# Altium PCB MainPCB.PcbDoc (part 3 of 3)
Units mil, origin at the board's own origin, x right, y up, seen from the top; angles counter-clockwise.
Board outline 2751.85 x 1031.01 mil, 4 copper layers (L1, L2, L3, L4), stack 61.583 mil thick; 64 components, 73 nets, 299 pads, 162 vias.
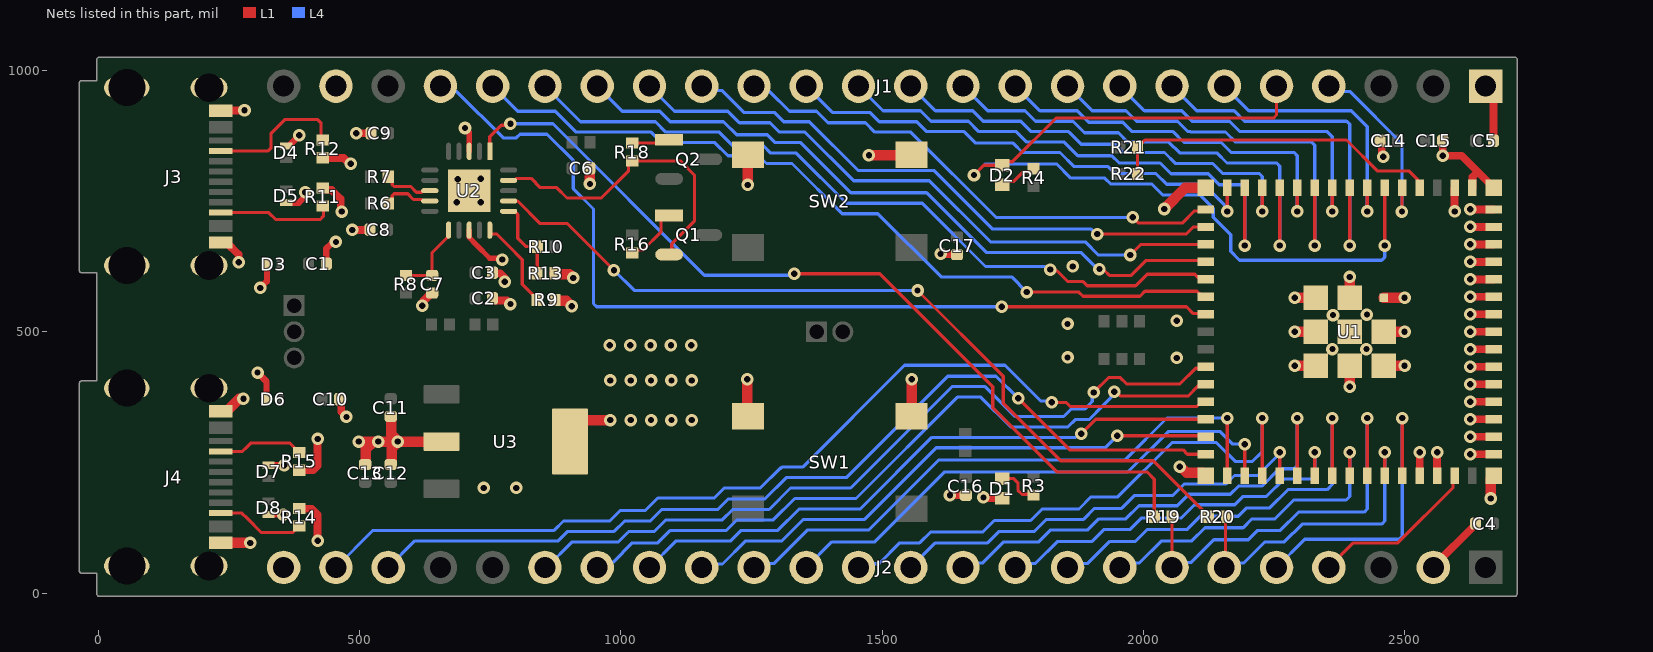
[diagram p4: the nets of this part, all layers, seen from the top]

## Via types
v1: diameter 24, hole 12, L1 to L4, tented both sides, 162 vias

## Nets (pads, with @x,y where several pads share a name; then routed paths per layer and width w, separated by ;. In a path a pad name is that pad's centre, name@x,y a point inside that pad or via, vN(x,y) a via of type N, cw(c..) or ccw(c..) an arc to the next point about the centre after c; other vN are vias at no path point) (continued)
FTDI_RESET: C7.2 R8.2 U2.11 | length 149.8
  L1 w6: R8.2@589,608.01 R8.2@589,608.01 638.96,607.97 C7.2@639,607.93 639,651.65 670.63,683.28 U2.11@670.63,694.59
FTDI_USB_N: R6.2 U2.9 | length 97.2
  L1 w6.03: R6.2@555.01,745.56 562.62,753.17 562.62,760.51 566.16,764.04 592.3,764.04 603.2,753.14 619.05,753.14 621.88,750.32 U2.9@634.59,750.32
FTDI_USB_P: R7.2 U2.8 | length 97.2
  L1 w6.03: R7.2@555.01,796.56 562.62,788.94 562.62,781.61 566.16,778.07 598.11,778.07 609.01,767.17 619.05,767.17 621.88,770 U2.8@634.59,770
GND: C1.1 C2.1 C3.1 C4.1 C5.1 C6.1 C7.1 C8.1 C9.1 C10.1 C11.1 C12.1 C13.1 C14.1 C15.1 C16.1 C17.1 D1.1 D3.1 D4.1 D5.1 D6.1 D7.1 D8.1 J1.1 J1.23 J2.2 J2.24 J3.A1B12 J3.B1A12 J3.S1 J3.S2 J3.S3 J3.S4 J4.A1B12 J4.B1A12 J4.S1 J4.S2 J4.S3 J4.S4 R9.2 R11.1 R12.1 R13.2 R14.1 R15.1 SW1.3 SW1.4 SW2.3 SW2.4 U1.1 U1.2 U1.42 U1.43 U1.46 U1.47 U1.48 U1.49 U1.50 U1.51 U1.52 U1.53 U1.54 U1.55 U1.56 U1.57 U1.58 U1.59 U1.60 U1.61 U1.62 U1.63 U1.64 U1.65 U1.66 U1.67 U1.68 U1.69 U1.70 U1.71 U1.72 U1.73 U2.3 U2.13 U2.21 U3.2 U3.4 | length 3857
  L1 w10.01: v1(702,890) 710,882 U2.3@710,845.41 ; U2.13@710,694.59 710,680.2 724.2,666 749.32,640.88 770.52,640.88 v1(773.2,638.2)
  L1 w12: v1(305,422) 322.12,404.88 D6.1@322.12,371 ; v1@309,584 v1(310,584) 322.95,596.95 D3.1@322.95,629 ; D8.1@326,150.2 v1(354.48,150.2) ; D7.1@326,244.8 v1(355.88,244.8) ; D5.1@360,747.2 384.2,747.2 396,759 v1(396,767) ; D4.1@360,855.59 364.92,855.59 385,875.67 v1(385,876) ; C1.1@436.68,630.23 436.68,659.43 446.95,669.7 452.7,669.7 v1(455,672)
  L1 w15: J3.B1A12@234.84,671.02 245.67,671.02 269,647.68 v1(269,633) ; J3.A1B12@234.84,922.98 235.35,923.49 279.49,923.49 v1(280,924) ; R14.1@385,162.01 385.63,161.37 408.63,161.37 420,150 v1(420,100) ; R15.1@385,234.99 411.21,234.99 420,243.78 v1(420,295) ; R11.1@430,775.01 433.13,771.88 446.3,771.88 464.28,753.9 464.28,731.72 v1(466,730) ; R12.1@430,832.99 434.01,832.99 434.31,832.69 469.88,832.69 481.02,821.54 v1(483.46,821.54) ; C10.1@461.93,371 465.06,367.87 465.06,346.94 v1(475,337) ; v1(486,695) 519.51,695 C8.1@520.07,695.56 ; v1(494,880) C9.1@522.07,880 ; v1(620,550) 621.72,551.72 621.72,557.97 637.82,574.07 C7.1@639,574.07 ; C2.1@754.93,564 754.93,562.82 758.06,559.69 782.31,559.69 v1(789,553) ; C3.1@754.93,613 755.93,612 769.21,612 778,603.21 v1(778,596) ; v1(1612,649) 1612.62,648.38 1642.89,648.38 C17.1@1643.5,647.76 ; v1(1630,187) 1630.06,187.06 1660.44,187.06 C16.1@1660.5,187.12 ; v1(1694,183) 1694.85,182.15 1729.15,182.15 D1.1@1730,181.3 ; C14.1@2453.03,865.55 2456.16,862.42 2456.16,837.84 v1(2459,835) ; U1.42@2528.89,224.41 v1(2528.89,269.58) ; J2.2@2555,49 2555,50.75 2636.07,131.82 C4.1@2636.07,133 ; U1.43@2562.35,224.41 v1(2562.35,269.58) ; C15.1@2573.1,865.55 2573.1,837.1 v1(2573,837) 2609.21,837 2639.92,806.3 ; v1(2595.82,730.42) U1.2@2595.82,775.59 ; v1(2625.45,265.75) U1.46@2670.62,265.75 ; v1(2625.45,299.21) U1.47@2670.62,299.21 ; v1(2625.45,332.68) U1.48@2670.62,332.68 ; v1(2625.45,366.14) U1.49@2670.62,366.14 ; v1(2625.45,399.61) U1.50@2670.62,399.61 ; v1(2625.45,433.07) U1.51@2670.62,433.07 ; v1(2625.45,466.54) U1.52@2670.62,466.54 ; v1(2625.45,500) U1.53@2670.62,500 ; v1(2625.45,533.46) U1.54@2670.62,533.46 ; v1(2625.45,566.93) U1.55@2670.62,566.93 ; v1(2625.45,600.39) U1.56@2670.62,600.39 ; v1(2625.45,633.86) U1.57@2670.62,633.86 ; v1(2625.45,667.32) U1.58@2670.62,667.32 ; v1(2625.45,700.79) U1.59@2670.62,700.79 ; v1(2625.45,734.25) U1.60@2670.62,734.25 ; U1.1@2629.28,775.59 2629.66,775.96 2629.66,796.04 2639.92,806.3 ; J1.1@2655,970 2669.95,955.05 C5.1@2669.95,865.55 ; U1.62@2670.62,775.59 2639.92,806.3
  L1 w20: J4.B1A12@234.84,96.02 v1(291,96) ; J4.A1B12@234.84,347.98 245.67,347.98 269.68,372 v1(278,372) ; v1(498.5,290) v1(536,290) v1(573.5,290) ; C13.1@512.18,245.93 512.18,275.18 v1@527,290 ; C12.1@560,245.93 561.18,245.93 561.81,246.56 561.81,277.23 573.5,288.92 v1(573.5,290) ; C11.1@560,338.07 560.44,338.07 561.07,337.44 561.07,303.51 573.5,291.08 v1(573.5,290) ; U3.2@656.97,290 v1(573.5,290) ; R13.2@873.91,611.89 873.91,610.7 874.54,610.07 901.93,610.07 v1(909,603) ; R9.2@874.23,560.89 874.23,559.7 874.86,559.07 895.93,559.07 v1(906,549) ; U3.4@903.03,290 903.03,306.55 927.48,331 v1(980,331) ; C6.1@940.93,813 940.96,812.96 v1(941,783) v1(941,783) ; v1(1242,409) 1242,340.09 SW1.4@1243.5,338.58 ; v1(1243,781) 1243,838.08 SW2.4@1243.5,838.58 ; v1(1475,838) 1555.91,838 SW2.3@1556.5,838.58 ; SW1.3@1556.5,338.58 1557,339.09 v1(1557,409) ; v1(2040,735) 2080.59,775.59 U1.63@2119.44,775.59 ; v1(2070,242) 2071.08,242 2082.92,230.16 2113.69,230.16 U1.64@2119.44,224.41 ; v1(2290,435.08) U1.73@2330.03,435.08 ; v1(2290,500.04) U1.72@2330.03,500.04 ; v1(2290,565) 2330.03,565 U1.71@2330.07,564.96 ; v1(2394.99,394.97) U1.70@2395.03,435.04 ; U1.69@2395.07,565 v1(2395.07,605.03) ; U1.68@2459.99,435.04 v1(2500.06,435) ; U1.67@2459.99,500 v1(2500.06,499.96) ; U1.66@2460.03,564.92 v1(2500.06,564.92) ; v1(2665,181) 2665,218.79 U1.65@2670.62,224.41
  other v1: 737.95,201.24 800,201.24 1019,331 1058,331 1097,331 1136,331 980,407 1019,407 1058,407 1097,407 1136,407 2063.98,450 1855,451 2362,467 2427,467 979,474 1018,474 1057,474 1096,474 1135,474 1855,515 2063.98,521 2363,532 2428,533 1865,625 686,748 732,748 688,792 732,793
GPIO0: R21.2 R22.2 U1.4 | length 641.9
  L1 w6: R22.2@1989.01,802 1989.01,854.18 1994.64,859.81 1995.82,859.81 2003.01,867 2388.82,867 2447.82,808 2507.85,808 2526.01,789.84 2526.01,778.46 U1.4@2528.89,775.59
GPIO1: J1.4 U1.5 | length 361.3
  L1 w6: v1(2495,730) 2495,775.17 U1.5@2495.42,775.59
  L4 w6: J1.4@2355,970 2365,960 2395,960 2495,860 v1(2495,730)
GPIO2: D2.1 J1.5 U1.6 | length 1716.4
  L1 w6: v1(1676,800) 1694.7,818.7 D2.1@1730,818.7 1736.81,825.51 1749.51,825.51 1833,909 2249.14,909 2255,914.86 J1.5@2255,970 ; v1(2461.96,665.03) U1.6@2461.96,775.59
  L4 w6: v1(1676,800) 1697,821 1834.29,821 1861.29,794 1926.29,794 1937.29,783 2015.73,783 2036.73,762 2108.01,762 2133.78,736.23 2133.78,719.24 2167.24,685.78 2167.24,653.85 2184.09,637 2456.1,637 2461.96,642.86 v1(2461.96,665.03)
GPIO3: J1.6 U1.7 | length 512.9
  L1 w6: v1(2428.49,730.42) U1.7@2428.49,775.59
  L4 w6: J1.6@2155,970 2202,923 2398.04,923 2428.49,892.54 v1(2428.49,730.42)
GPIO4: J1.7 U1.8 | length 712.9
  L1 w6: v1(2395.03,665.03) U1.8@2395.03,775.59
  L4 w6: J1.7@2055,970 2102,923 2173.72,923 2193.72,903 2389.17,903 2395.03,897.14 v1(2395.03,665.03)
GPIO5: J1.8 U1.9 | length 634.7
  L1 w6: v1(2361.57,730.42) U1.9@2361.57,775.59
  L4 w6: J1.8@1955,970 2002,923 2073.72,923 2093.72,903 2165,903 2185,883 2352,883 2361.57,873.43 v1(2361.57,730.42)
GPIO6: J1.9 U1.10 | length 822.5
  L1 w6: v1(2328.1,665.03) U1.10@2328.1,775.59
  L4 w6: J1.9@1855,970 1902,923 1967,923 1987,903 2065.43,903 2085.43,883 2090,883 2090.64,882.36 2157.36,882.36 2176.72,863 2322.24,863 2328.1,857.14 v1(2328.1,665.03)
GPIO7: J1.10 U1.11 | length 746.6
  L1 w6: v1(2294.64,730.42) U1.11@2294.64,775.59
  L4 w6: J1.10@1755,970 1802,923 1873.72,923 1895.72,901 1960.72,901 1978.72,883 2057.15,883 2077.79,862.36 2149.07,862.36 2168.43,843 2288.78,843 2294.64,837.14 v1(2294.64,730.42)
GPIO8: J1.11 U1.12 | length 932.2
  L1 w6: v1(2261.17,665.03) U1.12@2261.17,775.59
  L4 w6: J1.11@1655,970 1702,923 1773.72,923 1793.72,903 1865.43,903 1887.43,881 1952.43,881 1970.43,863 2048.86,863 2069.51,842.36 2140.79,842.36 2160.15,823 2255.31,823 2261.17,817.14 v1(2261.17,665.03)
GPIO9: J1.12 U1.13 | length 856.2
  L1 w6: v1(2227.71,730.42) U1.13@2227.71,775.59
  L4 w6: J1.12@1555,970 1602,923 1673.72,923 1693.72,903 1765.43,903 1785.43,883 1857.15,883 1881.15,859 1946.15,859 1962.15,843 2040.58,843 2061.22,822.36 2132.51,822.36 2151.86,803 2221.85,803 2227.71,797.14 v1(2227.71,730.42)
GPIO10: J1.13 U1.14 | length 1040.9
  L1 w6: v1(2194.24,665.03) U1.14@2194.24,775.59
  L4 w6: J1.13@1455,970 1502,923 1573.72,923 1593.72,903 1665.43,903 1685.43,883 1757.15,883 1777.15,863 1848.86,863 1874.86,837 1939.86,837 1953.86,823 2032.29,823 2052.94,802.36 2124.22,802.36 2145.09,781.49 2188.38,781.49 2194.24,775.63 v1(2194.24,665.03)
GPIO11: J1.14 U1.15 | length 954.3
  L1 w6: v1(2160.78,730.42) U1.15@2160.78,775.59
  L4 w6: J1.14@1355,970 1405,920 1476.72,920 1493.72,903 1494,903 1495,902 1566.43,902 1585.43,883 1657.15,883 1679.15,861 1750.86,861 1768.86,843 1840.58,843 1867.58,816 1932.58,816 1945.58,803 2024.01,803 2044.65,782.36 2115.94,782.36 2155.23,743.06 2155.23,739.76 2160.78,734.21 v1(2160.78,730.42)
GPIO12: J1.15 U1.16 | length 983.8
  L1 w6: v1(1980,719) 1991,708 2074.55,708 2097.93,731.38 2116.57,731.38 U1.16@2119.44,734.25
  L4 w6: J1.15@1255,970 1265.33,959.67 1285.33,959.67 1323,922 1374.72,922 1396.72,900 1468.43,900 1486.43,882 1555,882 1718,719 v1(1980,719)
GPIO13: J1.16 U1.17 | length 1087.4
  L1 w6: v1(1912,687) 2081.83,687 2095.11,700.28 2118.93,700.28 U1.17@2119.44,700.79
  L4 w6: J1.16@1155,970 1163.1,961.9 1193.37,961.9 1235.27,920 1294,920 1312,902 1361,902 1454,809 1599,809 1711,697 1899.14,697 1909.14,687 v1(1912,687)
GPIO14: J1.17 U1.18 | length 1206.6
  L1 w6: v1(1975,647) 1995,667 2090.12,667 2090.44,667.32 U1.18@2119.44,667.32
  L4 w6: J1.17@1055,970 1103,922 1204.99,922 1226.99,900 1285.72,900 1303.72,882 1352.72,882 1445.72,789 1590.72,789 1707.72,672 1888.82,672 1913.82,647 v1(1975,647)
GPIO15: J1.18 U1.19 | length 1327.5
  L1 w6: v1(1916,620) 1918.68,617.32 1925.68,617.32 1935,608 1977,608 2005.73,636.73 2116.57,636.73 U1.19@2119.44,633.86
  L4 w6: J1.18@955,970 1003,922 1074.72,922 1094.72,902 1196.7,902 1221.7,877 1280.43,877 1295.43,862 1344.43,862 1440.43,766 1585.43,766 1699.43,652 1880.53,652 1912.53,620 v1(1916,620)
GPIO16: J1.19 U1.20 | length 1435.8
  L1 w6: v1(1822,619) 1824.68,616.32 1835.5,616.32 1855.82,596 1884.82,596 1892.82,588 1985.28,588 1994.8,597.52 2007.28,610 2098.46,610 2105.2,603.27 2116.57,603.27 U1.20@2119.44,600.39
  L4 w6: J1.19@855,970 923,902 1066.43,902 1086.43,882 1188.42,882 1213.42,857 1272.15,857 1287.15,842 1336.15,842 1432.15,746 1577.15,746 1698.15,625 1812.21,625 1818.21,619 v1(1822,619)
GPIO17: J1.20 U1.21 | length 1540.4
  L1 w6: v1(1777,576) 1876.53,576 1884.53,568 1993.57,568 2003.09,577.52 2102.83,577.52 2108.69,571.66 2108.69,569.8 2111.57,566.93 U1.21@2119.44,566.93
  L4 w6: J1.20@755,970 803,922 874.72,922 914.72,882 1058.15,882 1078.15,862 1180.13,862 1205.13,837 1263.86,837 1278.86,822 1327.86,822 1423.86,726 1492,726 1613,605 1748,605 v1(1777,576)
GPIO18: J1.21 U1.22 | length 1788.8
  L1 w6: v1(1729,548) 2082.71,548 2095.93,534.79 2118.12,534.79 U1.22@2119.44,533.46
  L4 w6: J1.21@655,970 665.33,959.67 686.19,959.67 774.86,871 800.18,871 807.18,878 859,878 909,828 909,774 948,735 948,553.86 953.86,548 v1(1729,548)
GPIO21: J2.19 U1.25 | length 1489.7
  L1 w6: v1(1905,384) 1933.41,412.41 1955.78,412.41 1968.18,400 2070,400 2100.2,430.2 2116.57,430.2 U1.25@2119.44,433.07
  L4 w6: J2.19@855,49 858,49 907,98 995.72,98 1013.72,116 1014,116 1016,118 1064.72,118 1086.72,140 1194.15,140 1214.15,160 1283.86,160 1324.86,201 1440,201 1634,395 1697.28,395 1754.28,338 1847.53,338 1861.53,352 1887.74,352 1902.32,366.58 1902.32,381.32 v1(1905,384)
GPIO26: J2.18 U1.26 | length 1366.7
  L1 w6: v1(1944.59,385.41) 1948.38,385.41 1956.79,377 2085.46,377 2105.2,396.73 2116.57,396.73 U1.26@2119.44,399.61
  L4 w6: J2.18@955,49 965.33,59.33 985.33,59.33 1022,96 1071,96 1095,120 1202.43,120 1222.43,140 1292.15,140 1333.15,181 1450.15,181 1644.15,375 1689,375 1746,318 1855.82,318 1869.82,332 1896.03,332 1922.32,358.29 1937.92,373.89 1937.92,374.95 1944.59,381.62 v1(1944.59,385.41)
GPIO33: J2.17 U1.28 | length 1181.9
  L1 w6: v1(1881,305) 1908.77,332.77 U1.28@2119.35,332.77
  L4 w6: J2.17@1055,49 1106,100 1210.72,100 1230.72,120 1300.43,120 1341.43,161 1458.43,161 1595.43,298 1870.21,298 1877.21,305 v1(1881,305)
GPIO34: J2.16 U1.29 | length 1069.6
  L1 w6: v1(1950,301) 2117.65,301 U1.29@2119.44,299.21
  L4 w6: J2.16@1155,49 1161.73,55.73 1194.73,55.73 1239,100 1308.72,100 1349.72,141 1466.72,141 1603.72,278 1927,278 v1(1950,301)
GPIO35: J2.15 U1.31 | length 1134.8
  L1 w6: U1.31@2160.78,224.41 v1(2160.78,334.97)
  L4 w6: J2.15@1255,49 1262.73,56.73 1293.73,56.73 1358,121 1475,121 1609,255 1965.43,255 2045.4,334.97 v1(2160.78,334.97)
GPIO36: J2.14 U1.32 | length 1017.3
  L1 w6: v1(2194,285) 2194.12,284.88 2194.12,224.53 U1.32@2194.24,224.41
  L4 w6: J2.14@1355,49 1404,98 1486,98 1620,232 1970.72,232 2047.72,309 2147.28,309 2171.28,285 v1(2194,285)
GPIO37: J2.13 U1.33 | length 1069.2
  L1 w6: U1.33@2227.71,224.41 v1(2227.71,334.97)
  L4 w6: J2.13@1455,49 1462.23,56.23 1494.23,56.23 1534,96 1572,96 1593,117 1693,117 1715,139 1784.43,139 1806.43,161 1877,161 1900,184 1951,184 2055,288 2140,288 2176,252 2209,252 2227.71,270.71 v1(2227.71,334.97)
GPIO38: J2.12 U1.34 | length 844.2
  L1 w6: U1.34@2261.17,224.41 v1(2261.17,269.58)
  L4 w6: J2.12@1555,49 1602,96 1702,96 1724,118 1791.72,118 1814.72,141 1885.72,141 1906.72,162 1958.43,162 1983.43,187 2056.72,187 2078.72,209 2158.43,209 2174.43,225 2219.15,225 2261.17,267.02 v1(2261.17,269.58)
GPIO39: J2.11 U1.35 | length 922
  L1 w6: U1.35@2294.64,224.41 v1(2294.64,334.97)
  L4 w6: J2.11@1655,49 1663.73,57.73 1692.73,57.73 1733,98 1800,98 1823,121 1894,121 1915,142 1966.72,142 1991.72,167 2065,167 2087,189 2166.72,189 2182.72,205 2227.43,205 2260.43,238 2288.78,238 2294.64,243.86 v1(2294.64,334.97)
GPIO40: J2.10 U1.36 | length 736.4
  L1 w6: U1.36@2328.1,224.41 v1(2328.1,269.58)
  L4 w6: J2.10@1755,49 1762.73,56.73 1793.73,56.73 1836,99 1902,99 1925,122 1975,122 1997,144 2073,144 2098,169 2175,169 2191,185 2235.72,185 2268.72,218 2322.2,218 2328.1,223.9 v1(2328.1,269.58)
GPIO41: J2.9 U1.37 | length 810
  L1 w6: U1.37@2361.57,224.41 v1(2361.57,334.97)
  L4 w6: J2.9@1855,49 1862.73,56.73 1893.73,56.73 1936,99 1985,99 2008,122 2084,122 2109,147 2182,147 2198,163 2242,163 2277,198 2351.71,198 2361.57,207.86 v1(2361.57,334.97)
GPIO42: J2.8 U1.38 | length 626.2
  L1 w6: U1.38@2395.03,224.41 v1(2395.03,269.58)
  L4 w6: J2.8@1955,49 1963.73,57.73 1992.73,57.73 2035,100 2093,100 2118,125 2191,125 2208,142 2252,142 2288,178 2388.17,178 2395.03,184.86 v1(2395.03,269.58)
GPIO45: J2.5 U1.41 | length 601.9
  L1 w6: U1.41@2495.42,224.41 v1(2495.42,334.97)
  L4 w6: J2.5@2255,49 2309,103 2489.57,103 2495.42,108.86 v1(2495.42,334.97)
GPIO46: J2.4 U1.44 | length 325
  L1 w6: J2.4@2355,49 2402,96 2487,96 2592.94,201.94 2592.94,221.54 U1.44@2595.82,224.41
GPIO47: J2.23 U1.27 | length 1861.2
  L1 w6: v1(1825,365) 1852,365 1860,357 2102.42,357 2111.57,366.14 U1.27@2119.44,366.14
  L4 w6: J2.23@455,49 526,120 872.43,120 890.43,138 979.15,138 999.15,158 1047,158 1071,182 1179,182 1198,201 1267,201 1305,239 1306.29,239 1308.29,241 1348,241 1543,436 1735.37,436 1803.69,367.68 1822.32,367.68 v1(1825,365)
GPIO48: J2.22 U1.30 | length 1777.9
  L1 w6: v1(1760.59,372.59) 1859.18,274 2076.18,274 2084.44,265.75 U1.30@2119.44,265.75
  L4 w6: J2.22@555,49 606,100 880.72,100 898.72,118 987.43,118 1007.43,138 1056.43,138 1078.43,160 1185.86,160 1205.86,180 1275.58,180 1316.58,221 1431.72,221 1625.72,415 1718.18,415 v1(1760.59,372.59)
NetD1_2: D1.2 R3.1 | length 81.2
  L1 w6: D1.2@1730,218.7 1730.3,219 1752,219 1760,211 1760,197 1768,189 1788.99,189 R3.1@1790,187.99
NetD2_2: D2.2 R4.1 | length 72.7
  L1 w6: D2.2@1730,781.3 1736.81,788.11 1752.11,788.11 1770.38,806.38 1784.37,806.38 R4.1@1790,812.01
NetJ3_A5: J3.A5 R12.2 | length 269.6
  L1 w6: J3.A5@234.84,846.21 283,846.21 325.14,846.21 331,852.07 331,880 357,906 420.36,906 426.22,900.14 426.22,870.79 R12.2@430,867.01
NetJ3_B5: J3.B5 R11.2 | length 224.6
  L1 w6: J3.B5@234.84,728.1 326.69,728.1 339.79,715 425.14,715 431,720.86 431,739.99 R11.2@430,740.99
NetJ4_A5: J4.A5 R15.2 | length 164.8
  L1 w6: J4.A5@234.84,271.21 276.21,271.21 285,280 292,287 367.01,287 378.19,275.82 378.19,274.64 383.82,269.01 R15.2@385,269.01
NetJ4_B5: J4.B5 R14.2 | length 170.3
  L1 w6: J4.B5@234.84,153.1 274.9,153.1 285,143 312,116 372.33,116 378.19,121.86 378.19,122.36 383.46,127.63 R14.2@384.64,127.63
NetQ1_1: Q1.1 R16.2 | length 115.2
  L1 w6: R16.2@1022,650.99 1027.63,656.62 1042.62,656.62 1077.26,691.26 1077.26,716.43 1083.52,722.69 Q1.1@1092.71,722.69
NetQ2_1: Q2.1 R18.2 | length 73.4
  L1 w6: R18.2@1022,861.01 1070.87,861.01 1077.26,867.4 Q2.1@1092.71,867.4
NetR9_1: R9.1 U2.15 | length 178.7
  L1 w6: U2.15@749.37,694.59 749.37,687.61 749.6,687.38 762.21,687.38 783.59,666 811.49,638.09 811.49,590.78 840.21,562.07 R9.1@840.21,560.89
RTS_FTDI: Q1.2 R18.1 U2.19 | length 593.2
  L1 w6: U2.19@785.41,789.68 796.72,789.68 800.63,793.6 818,793.6 828.4,793.6 846,776 877.28,776 897.28,756 963,756 1015.19,808.19 1015.19,821.36 1020.82,826.99 1114.01,826.99 1141,800 1141,711.79 1097.51,668.29 1097.51,652.68 Q1.2@1092.71,647.89
RXD_FTDI: R19.2 U2.1 | length 1689
  L1 w6: U2.1@749.37,845.41 749.37,869 749.37,873.14 771.55,895.32 786.32,895.32 v1(789,898) ; v1(1332,611) 1495.82,611 1712,394.82 1712,354.72 1834.72,232 2007,232 2020.99,218.01 R19.2@2020.99,146
  L4 w6: v1(789,898) 870.43,898 1160.11,608.32 1329.32,608.32 v1(1332,611)
TXD_FTDI: R20.2 U2.17 | length 1621
  L1 w6: U2.17@785.41,750.32 802.68,750.32 846,707 898,707 v1(987,618) ; v1(1568,579) 1732,415 1732,363 1841.82,253.18 2018.99,253.18 2124.99,147.18 R20.2@2124.99,146
  L4 w6: v1(987,618) 1025.82,579.18 1567.82,579.18 v1(1568,579)
U0RXD: J2.6 R20.1 U1.40 | length 619.3
  L1 w6: J2.6@2155,49 2157,51 2157,144 R20.1@2159.01,146 ; U1.40@2461.96,224.41 v1(2461.96,269.58)
  L4 w6: J2.6@2155,49 2163.73,57.73 2192.73,57.73 2233,98 2270,98 2304,132 2456.1,132 2461.96,137.86 v1(2461.96,269.58)
U0TXD: J2.7 R19.1 U1.39 | length 801.5
  L1 w6: J2.7@2055,49 R19.1@2055.01,146 ; U1.39@2428.49,224.41 v1(2428.49,334.97)
  L4 w6: J2.7@2055,49 2064.73,58.73 2091.73,58.73 2135,102 2201,102 2219,120 2262,120 2297,155 2422.64,155 2428.49,160.86 v1(2428.49,334.97)
VBUS_SENSE: R10.1 R13.1 U2.16 | length 161.5
  L1 w6: U2.16@785.41,730.63 797.14,730.63 803,724.77 803,679 819.11,662.89 R10.1@840.73,662.89 840.31,662.47 840.31,612.3 R13.1@839.89,611.89
pads on no net: J1.24 J3.A8 J3.B8 J4.A8 J4.B8 U2.2 U2.4 U2.5 U2.6 U2.7 U2.14

## Polygon pours and split planes (outlines as drawn)
GND on L1 "NONET_L02_P-001" (solid, pour order 10): 1178,137 1178,461 1138,501 928,501 776,349 509,349 486,326 486,236 488.53,236 497,236 501.36,234 671,234 692,255 800,255 837,218 837,138.17
GND on L1 "NONET_L02_P-001" (solid, pour order 9): 2265,627 2519,627 2521,625 2521,372 2266,372 2262,379
+5V_VBUS2 on L1 "NONET_L02_P-001" (solid, pour order 8): 435.31,323.74 392.5,304.04 355.76,301.21 339.43,305.88 340.9,355.63 340.77,370.82 340.59,393.68 344.09,456.07 359.4,471.38 399.07,468.44 402.91,445.93 434.47,403.28 436,385 438.94,380 438.81,371.9 438.58,356.98
+5V on L1 "NONET_L02_P-001" (solid, pour order 7): 695,401 695,360 683,359 671,358 535,362 509,390 409.03,487.97 379.22,478.37 355.46,484.71 352.42,512.42 362,522 389,522 402,509 422,507 422,508 523,407 689,407
+5V_VBUS1 on L1 "NONET_L02_P-001" (solid, pour order 5): 341,605.5 341,529.5 414,529.5 414,664.5 345,664.5 341,657.5
+3V3_REG on L1 "NONET_L02_P-001" (solid, pour order 3): 694,227 694,155 685,146 466,146 466,216 477,227 693,227
+3V3_FTDI on L1 "+3V3_FTDI" (solid, pour order 2): 599.96,560 578,560 546,592 542.28,708 568,708 596,736 598,736 597.87,714.34 596.77,713.23 595.93,712.65 578.05,694.52 564,682 562.46,678.7 562.49,668.42 567.07,664.61 575.15,637 568.45,617.08 568.45,592.71 575.15,586.16 600.85,585.42
+3V3_FTDI on L1 "NONET_L02_P-001" (solid, pour order 1): 919,876 919,801 848,801 833,816 833,876
+3V3 on L1 "NONET_L02_P-001" (solid, pour order 0): 2475,854 2550,854 2552,856 2552,927 2508,927 2485,927 2475,919
GND on L2 "GND_L02_P015" (solid, remove dead copper, pour order 15): 10,11 2697,11 2700,14 2695,19 2695,1017 12,1017 9,1014
+3V3_REG on L2 "+3V3_REG_L02_P014" (solid, pour order 14): 463.13,200 668,200 668,121 668,111 658,111 462,111
+3V3 on L2 "+3V3_L02_P013" (solid, pour order 13): 2686,18 2690,22 2690,1009 924,1009 922,1011 922,937 923,937 975,885 975,772 1017,772 1108,681 1404,681 1404,477 1406,475 1446.32,479.42 1471,507.8 1471,682 1478,689 1479,688 1796,688 1852,744 1853,743 2533,743 2549,727 2549,177 2321,177 2319,179 2318,178 2318,15 2682,15 2683,16
GND on L3 (split plane): 2695.91,14.09 17.09,14.09 17.09,38.14 17.05,38.57 17.07,39 16.85,40.53 16.7,42.06 16.58,42.48 16.52,42.91 16.01,44.36 15.56,45.83 15.36,46.21 15.21,46.62 14.43,47.95 13.7,49.31 13.43,49.64 13.21,50.01 12.18,51.16 11.2,52.35 10.87,52.63 10.58,52.95 9.35,53.87 8.16,54.85 7.78,55.06 7.43,55.32 6.04,55.98 4.68,56.71 4.27,56.83 3.88,57.02 2.39,57.41 0.91,57.85 0.48,57.89 0.06,58 -1.47,58.09 -3.01,58.24 -3.25,58.21 -3.35,58.22 -15.75,58.22 -15.75,385.78 -3.35,385.78 -3.25,385.79 -3.01,385.76 -1.47,385.91 0.06,386 0.48,386.11 0.91,386.15 2.39,386.59 3.88,386.98 4.27,387.17 4.68,387.29 6.04,388.02 7.43,388.68 7.78,388.94 8.16,389.15 9.35,390.13 10.58,391.05 10.87,391.37 11.2,391.65 12.18,392.84 13.21,393.99 13.43,394.36 13.7,394.69 14.43,396.05 15.21,397.38 15.36,397.79 15.56,398.17 16.01,399.64 16.52,401.09 16.58,401.52 16.7,401.94 16.85,403.47 17.07,405 17.05,405.43 17.09,405.86 17.09,613.14 17.05,613.57 17.07,614 16.85,615.53 16.7,617.06 16.58,617.48 16.52,617.91 16.01,619.36 15.56,620.83 15.36,621.21 15.21,621.62 14.43,622.95 13.7,624.31 13.43,624.64 13.21,625.01 12.18,626.16 11.2,627.35 10.87,627.63 10.58,627.95 9.35,628.87 8.16,629.85 7.78,630.06 7.43,630.32 6.04,630.98 4.68,631.71 4.27,631.83 3.88,632.02 2.39,632.41 0.91,632.85 0.48,632.89 0.06,633 -1.47,633.09 -3.01,633.24 -3.25,633.21 -3.35,633.22 -15.75,633.22 -15.75,960.78 -3.35,960.78 -3.25,960.79 -3.01,960.76 -1.47,960.91 0.06,961 0.48,961.11 0.91,961.15 2.39,961.59 3.88,961.98 4.27,962.17 4.68,962.29 6.04,963.02 7.43,963.68 7.78,963.94 8.16,964.15 9.35,965.13 10.58,966.05 10.87,966.37 11.2,966.65 12.18,967.84 13.21,968.99 13.43,969.36 13.7,969.69 14.43,971.05 15.21,972.38 15.36,972.79 15.56,973.17 16.01,974.64 16.52,976.09 16.58,976.52 16.7,976.94 16.85,978.47 17.07,980 17.05,980.43 17.09,980.86 17.09,1004.91 2695.91,1004.91

## Silkscreen, mask and mechanical layers (free items; w line width, h text height)
Top Overlay:
  lines w5: 755,102 755,122 ; 755,892 755,912 ; 1255,102 1255,122 ; 1255,892 1255,912 ; 1755,102 1755,122 ; 1755,892 1755,912 ; 2255,102 2255,122 ; 2255,892 2255,912
  lines w5.98: 2713,-3 0,-3 0,1022 2713,1022 2713,47 2713,-2
  text "J1" at 2358.58,848 h40
  text "BOOT" at 1695.06,700 h40
  text "BOOT" at 1326.06,570 h40
  text "UART_COM" at 16.89,549.33 h40
  text "USB1" at 432.77,532 h40
  text "REG" at 1200.2,481 h40
  text "3V3" at 1482.06,481 h40
  text "5V" at 457.96,476 h40
  text "ESP_COM" at 37.84,454.33 h40
  text "USB2" at 436.2,418 h40
  text "REST" at 1332.35,389 h40
  text "POW" at 1709.25,259 h40
  text "J2" at 2530.01,115 h40
Bottom Overlay:
  text "IO1" at 2340,840.33 h40 r270
  text "NC" at 359,831.77 h40 r270
  text "IO9" at 1572,825.1 h40 r270
  text "IO6" at 1868,825.1 h40 r270
  text "IO8" at 1666,823.2 h40 r270
  text "IO7" at 1775,823.2 h40 r270
  text "IO5" at 1972,823.2 h40 r270
  text "IO3" at 2170,823.2 h40 r270
  text "IO2" at 2259,823.2 h40 r270
  text "IO0" at 2436,823.2 h40 r270
  text "IO4" at 2075,821.29 h40 r270
  text "IO11" at 1368,811.01 h40 r270
  text "3V3" at 2539,800.15 h40 r270
  text "GND" at 455,795.96 h40 r270
  text "IO16" at 866,795.77 h40 r270
  text "GND" at 2639,795.96 h40 r270
  text "IO18" at 667,793.87 h40 r270
  text "IO17" at 768,793.87 h40 r270
  text "IO15" at 971,793.87 h40 r270
  text "IO13" at 1166,793.87 h40 r270
  text "IO12" at 1267,793.87 h40 r270
  text "IO10" at 1464,793.87 h40 r270
  text "IO14" at 1068,791.96 h40 r270
  text "+5V" at 559,785.87 h40 r270
  text "Produced By :" at 1978.79,574 h60
  text "MV" at 1262.13,564 h60
  text "(LLPCHS)" at 920.93,505.86 h40
  text "GitHub" at 1146.07,503 h40
  text "--PIN1--" at 2639,395.22 h40 r270
  text "GND" at 327,117.34 h40 r270
  text "IO47" at 430,117.34 h40 r270
  text "IO48" at 543,117.34 h40 r270
  text "USB-" at 640,117.34 h40 r270
  text "USB+" at 734,117.34 h40 r270
  text "IO21" at 834,117.34 h40 r270
  text "IO26" at 937,117.34 h40 r270
  text "IO33" at 1038,117.34 h40 r270
  text "IO34" at 1136,117.34 h40 r270
  text "IO35" at 1241,117.34 h40 r270
  text "IO36" at 1341,117.34 h40 r270
  text "IO37" at 1434,117.34 h40 r270
  text "IO38" at 1534,117.34 h40 r270
  text "IO39" at 1632,117.34 h40 r270
  text "IO40" at 1737,117.34 h40 r270
  text "IO41" at 1843,117.34 h40 r270
  text "IO42" at 1937,117.34 h40 r270
  text "TX" at 2037,117.34 h40 r270
  text "RX" at 2139,117.34 h40 r270
  text "IO45" at 2241,117.34 h40 r270
  text "IO46" at 2339,117.34 h40 r270
  text "EN" at 2437,117.34 h40 r270
  text "GND" at 2540,117.34 h40 r270
  text "+3V3" at 2639,117.34 h40 r270
Board Shape:
  lines w20: -31,6.83 ccw(c-24.17,6.83) -29,2 0.59,2 cw(c0.59,-1.41) 3,1 2702.17,1 ccw(c2702.17,7.83) 2707,3 2707,1017 4,1017 -31,1017 -31,6.83

## Text inside footprints (layer, text, board x,y; h text height)
J1: Bottom Overlay "1" at 2645,1045 h40 r270
J2: Bottom Overlay "1" at 2626,-74 h40 r270
J5: Top Overlay "1" at 302,416 h40